# Altium PCB Switchboard_node.PcbDoc
Units mm, origin at the board's own origin, x right, y up, seen from the top; angles counter-clockwise.
Board outline 20 x 30 mm, 2 copper layers (Top Layer, Bottom Layer); 3 components, 5 nets, 20 pads, 15 vias.
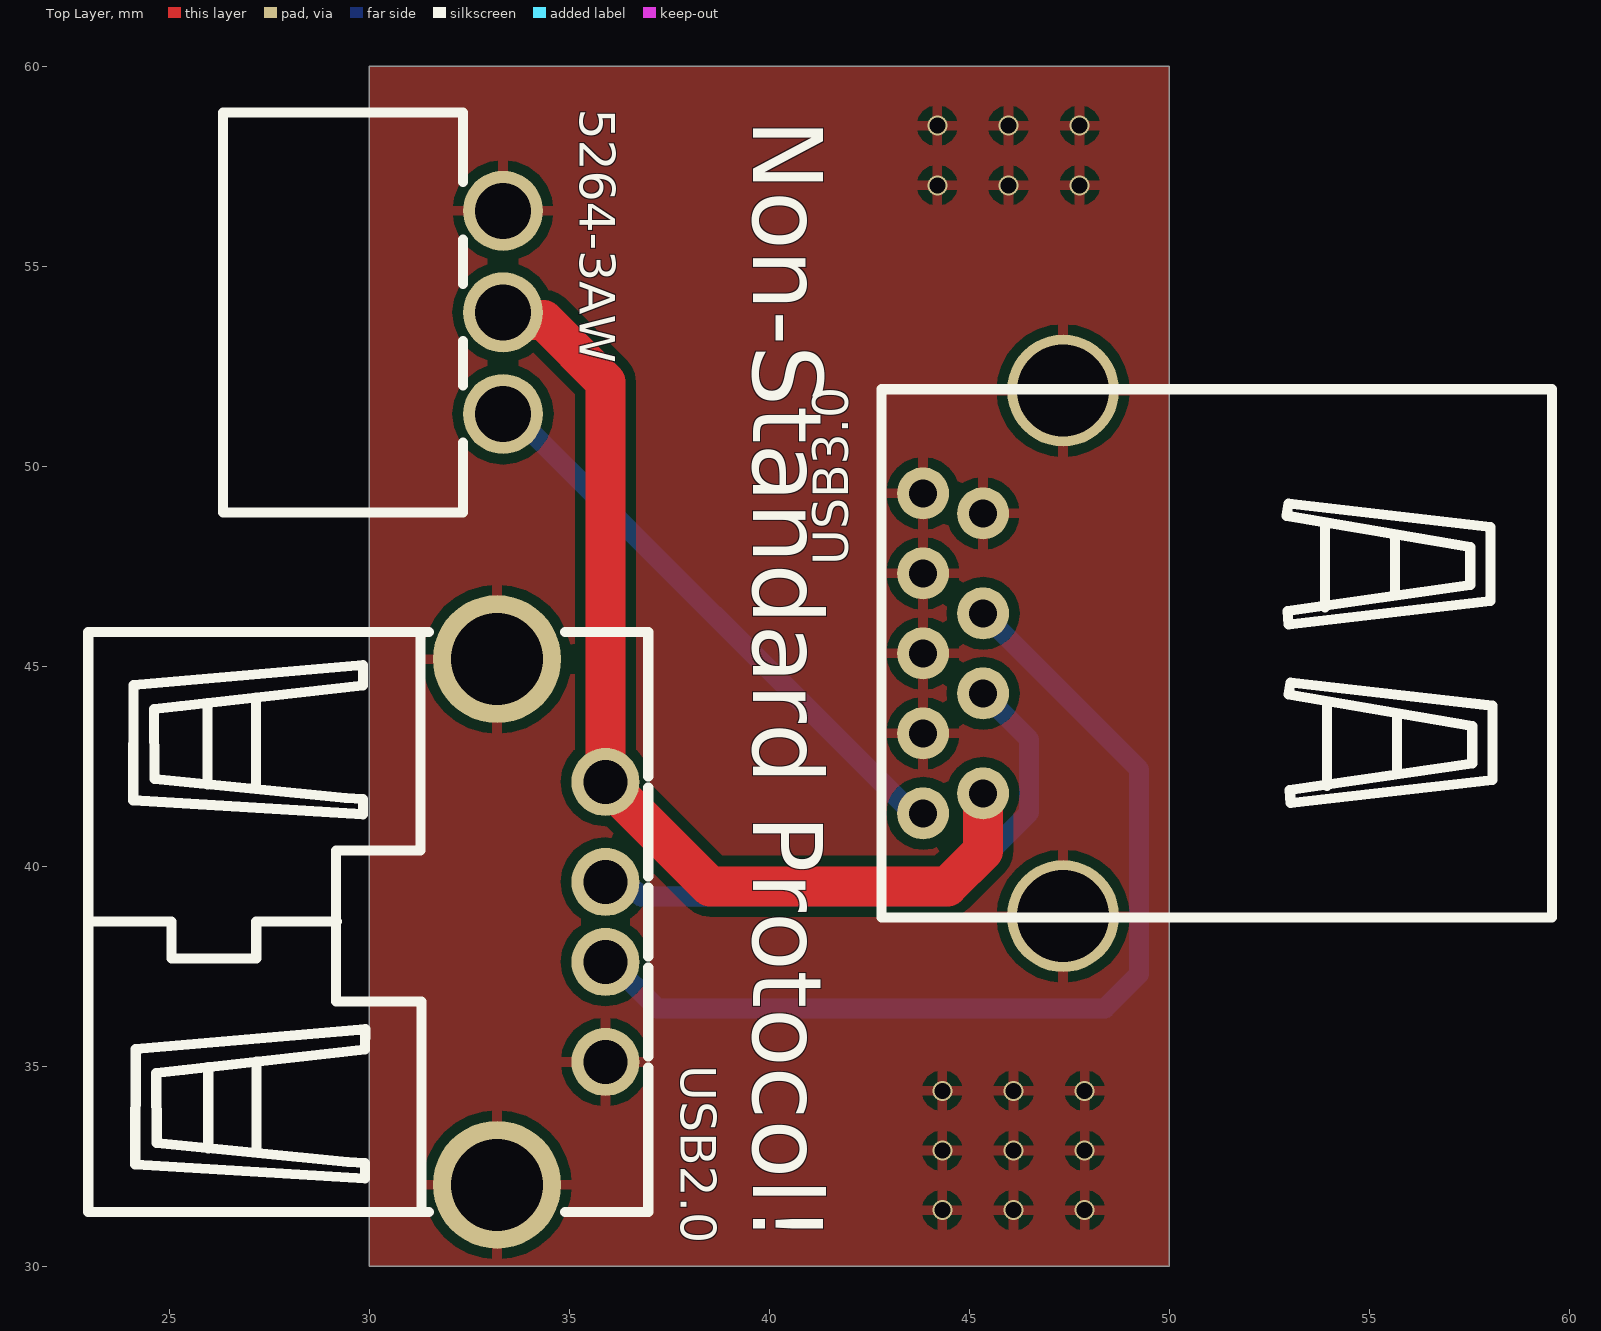
[diagram p0: Top Layer view]
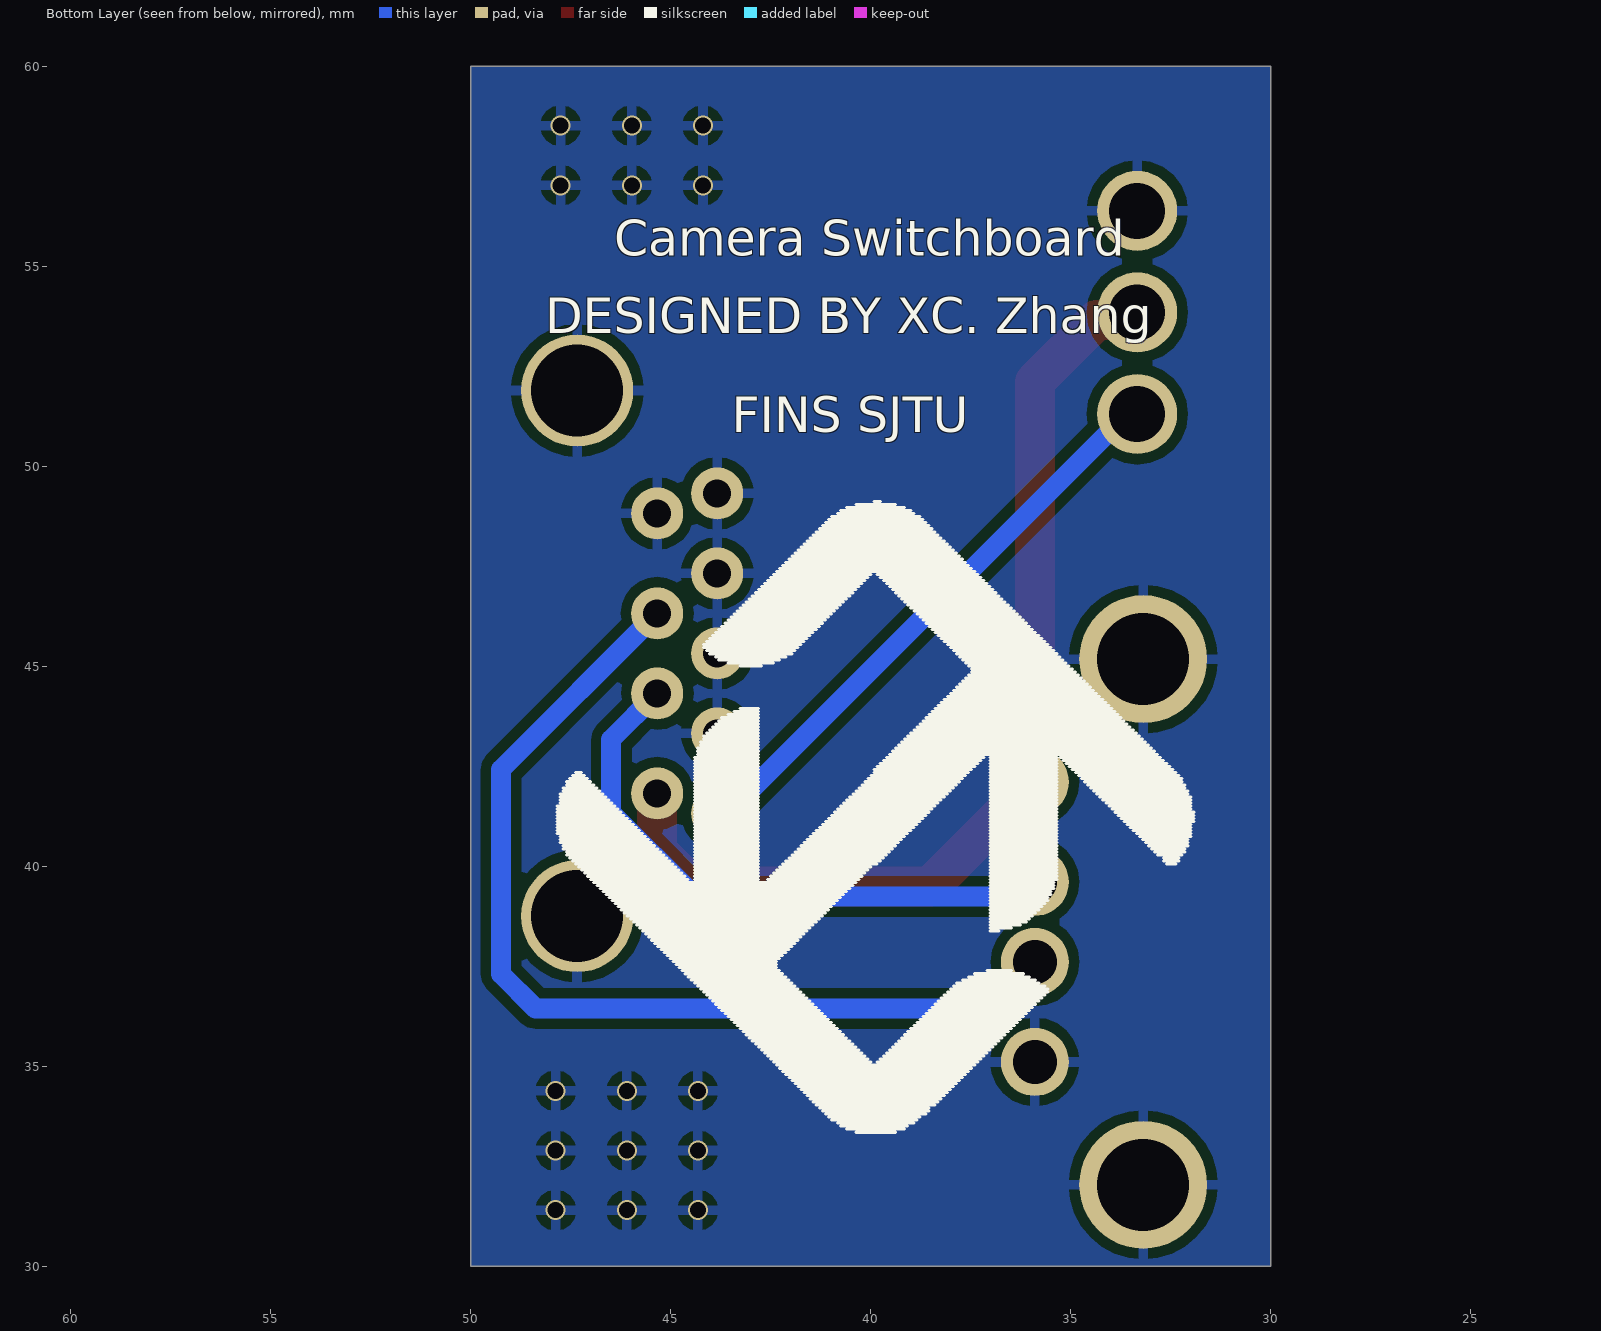
[diagram p1: Bottom Layer view, seen from below]

## Layer stack, top to bottom
Top Solder: solder mask 0.0102, Solder Resist, Dk 3.5
Top Layer: signal copper 0.0356
Dielectric 1: dielectric 0.32, FR-4, Dk 4.8
Bottom Layer: signal copper 0.0356
Bottom Solder: solder mask 0.0102, Solder Resist, Dk 3.5

## Board outline
30,30 30,60 50,60 50,30

## Design rules (kind name [scope] priority, off if disabled: settings)
Clearance [All] p1: gap=0.254 ignorepadtopadclearanceinfootprint=FALSE except(0: Arc-Hole Track-Hole SMDPad-Hole THPad-Hole Via-Hole Fill-Hole Poly-Hole Region-Hole Text-Hole)
PolygonConnect [All] p1: connectstyle=Relief reliefconductorwidth=0.254 reliefentries=4 polygonreliefangle="90 Angle" airgapwidth=0.254
RoutingVias [All] p1: holewidth=0.711 width=1.27 viastyle="Through Hole" minholewidth=0.711 minwidth=1.27 maxholewidth=0.711 maxwidth=1.27
SolderMaskExpansion [All] p1: expansion=0.102 istentingtop=FALSE
Width [All] p1: maxlimit=2 minlimit=0.254 preferedwidth=0.5 minimp=50.000000 maximp=50.000000 favimp=50.000000
30 further rules are at their usual default settings.

## Components (designator, comment, footprint, x,y, rotation, side; value= is the part's Value field where it differs from the comment)
5264-3AW "5264-3AW" CONN-TH_5264-3AW 32.639,53.848 r270 top
USB2.0 "U221-041N-1WR69-S-5" USB-A-TH_U221-041N-1WR69-S-5 34.544,38.608 r270 top
USB3.0 "USB-3.0-AF-90-16.5X12.5-H6.95" USB-3.0-TH_C69073 45.589,45.323 r90 top

## Footprints (in the part's own frame and the unit in brackets; to place one, negate y for a bottom-side part, rotate by r counter-clockwise, add the part's x,y. Pads: shape width x height; smd on the part's side, far side on the other; paste and mask are expansions set on the pad)
CONN-TH_5264-3AW [mm]
  round 2 hole 1.4: 1(2.54,0.7) 2(0,0.7) 3(-2.54,0.7)
  silkscreen extent -5,-6.3 5,-0.3
USB-3.0-TH_C69073 [mm]
  round 1.3 hole 0.7: 1(-3.5,0.25) 2(-1,0.25) 3(1,0.25) 4(3.5,0.25) 5(4,1.75) 6(2,1.75) 7(0,1.75) 8(-2,1.75) 9(-4,1.75)
  round 2.8 hole 2.3: 10(-6.57,-1.75) 11(6.57,-1.75)
  silkscreen extent -6.6,-13.97 6.6,2.79
USB-A-TH_U221-041N-1WR69-S-5 [mm]
  round 1.7 hole 1.1: 1(-3.5,1.355) 2(-1,1.355) 3(1,1.355) 4(3.5,1.355)
  round 3.2 hole 2.3: 5(-6.57,-1.355) 5(6.57,-1.355)
  silkscreen extent -7.25,-11.57 7.25,2.43

## Part data
5264-3AW: BOM_Manufacturer=ReliaPro, BOM_Manufacturer Part=5264-3AW, BOM_Paste Type=expand, BOM_Supplier=LCSC, BOM_Supplier Part=C48374, spicePre=C, spiceSymbolName=5264-3AW
USB2.0: BOM_Manufacturer="XKB Connectivity", BOM_Manufacturer Part=U221-041N-1WR69-S-5, BOM_Supplier=LCSC, BOM_Supplier Part=C725877, Contributor=LCSC, spicePre=U, spiceSymbolName=U221-041N-1WR69-S-5
USB3.0: BOM_Manufacturer=LCSC, BOM_Manufacturer Part=USB-3.0-AF-90-16.5X12.5-H6.95, BOM_Paste Type=expand, BOM_Supplier=LCSC, BOM_Supplier Part=C69073, Contributor=LCSC, spicePre=U, spiceSymbolName=USB-3.0-AF-90-16.5X12.5-H6.95

## Via types
v1: diameter 0.5, hole 0.4, Top Layer to Bottom Layer, 15 vias

## Nets (pads, with @x,y where several pads share a name; then routed paths per layer and width w, separated by ;. In a path a pad name is that pad's centre, name@x,y a point inside that pad or via, vN(x,y) a via of type N, cw(c..) or ccw(c..) an arc to the next point about the centre after c; other vN are vias at no path point)
+5: 5264-3AW.2 USB2.0.1 USB3.0.1 | length 25.6
  Top Layer w1: 5264-3AW.2 33.53,53.657 34.354,53.657 35.899,52.112 USB2.0.1 38.51,39.497 44.45,39.497 45.339,40.386 USB3.0.1
D+: USB2.0.3 USB3.0.3 | length 24.8
  Bottom Layer w0.5: USB2.0.3 36.033,37.608 37.192,36.449 48.387,36.449 49.243,37.305 49.243,42.419 USB3.0.3
D-: USB2.0.2 USB3.0.2 | length 15.1
  Bottom Layer w0.5: USB2.0.2 36.129,39.378 36.657,39.378 36.792,39.243 44.391,39.243 46.493,41.345 46.493,43.169 USB3.0.2
GND: 5264-3AW.3 USB2.0.4 USB2.0.5 USB3.0.4 USB3.0.5 USB3.0.6 USB3.0.7 USB3.0.8 USB3.0.10 USB3.0.11
  other v1: 44.323,31.401 46.101,31.401 47.879,31.401 44.323,32.893 46.101,32.893 47.879,32.893 44.323,34.385 46.101,34.385 47.879,34.385 44.196,57.023 45.974,57.023 47.752,57.023 44.196,58.515 45.974,58.515 47.752,58.515
S: 5264-3AW.1 USB3.0.9 | length 14.6
  Bottom Layer w0.5: 5264-3AW.1 33.597,51.308 43.582,41.323 USB3.0.9

## Polygon pours and split planes (outlines as drawn)
GND on Top Layer "GND_L01_P000" (solid, pour order 0): 30,30 30,60 50,60 50,30
GND on Bottom Layer "GND_L02_P001" (solid, pour order 1): 30,30 30,60 50,60 50,30

## Silkscreen, mask and mechanical layers (free items; w line width, h text height)
Top Overlay:
  text "Non-Standard Protocol!" at 39.022,58.674 h3 r270
Bottom Overlay:
  drawing of 457 lines, arcs and shapes, not listed
  text "Camera Switchboard" at 46.418,54.957 h1.52
  text "DESIGNED BY XC. Zhang" at 48.145,53.021 h1.52
  text "FINS SJTU" at 43.472,50.546 h1.52
Mechanical 1:
  the board outline again, w0.254